# Altium PCB CurrentS_2_accurate_3d.PcbDoc
Units mil, origin at the board's own origin, x right, y up, seen from the top; angles counter-clockwise.
Board outline 9000 x 3000 mil, 2 copper layers (Top Layer, Bottom Layer); 70 components, 36 nets, 196 pads, 18 vias.
Unrouted connection lines stored in the file: 51.
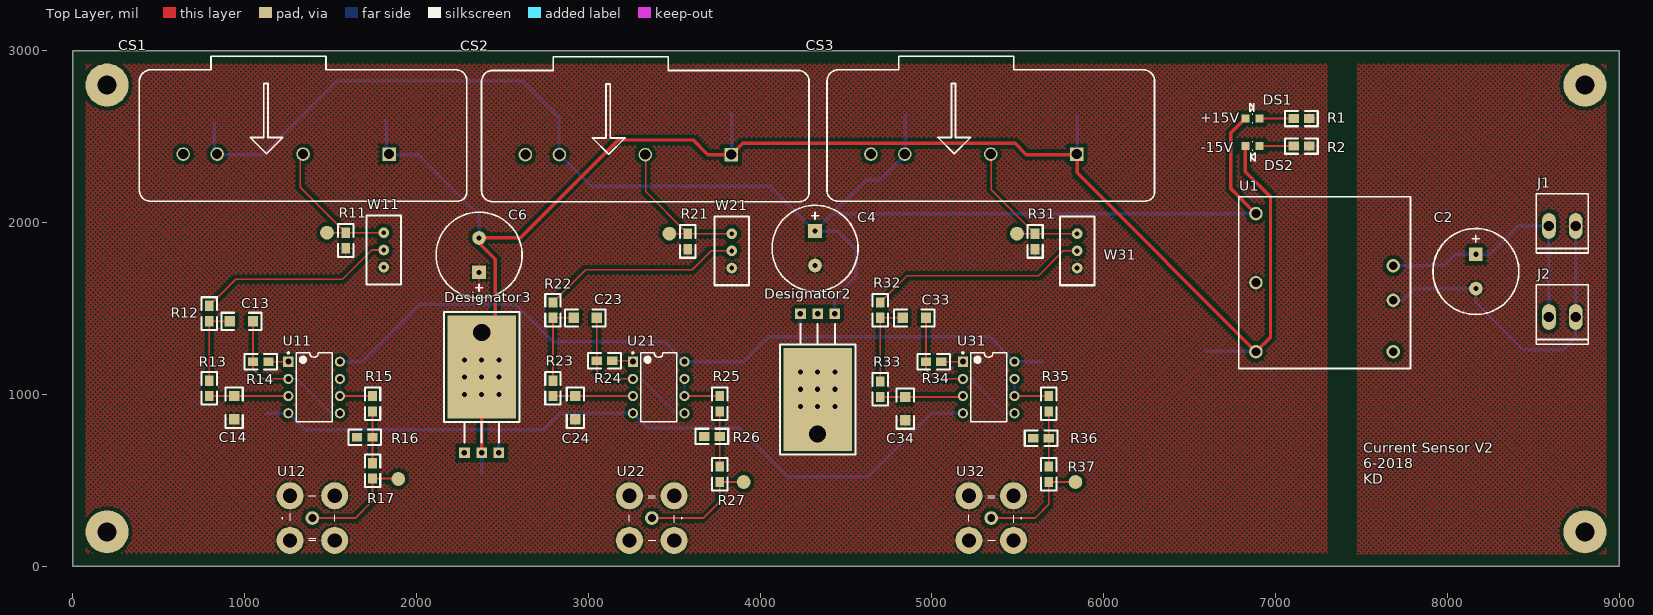
[diagram p0: Top Layer view]
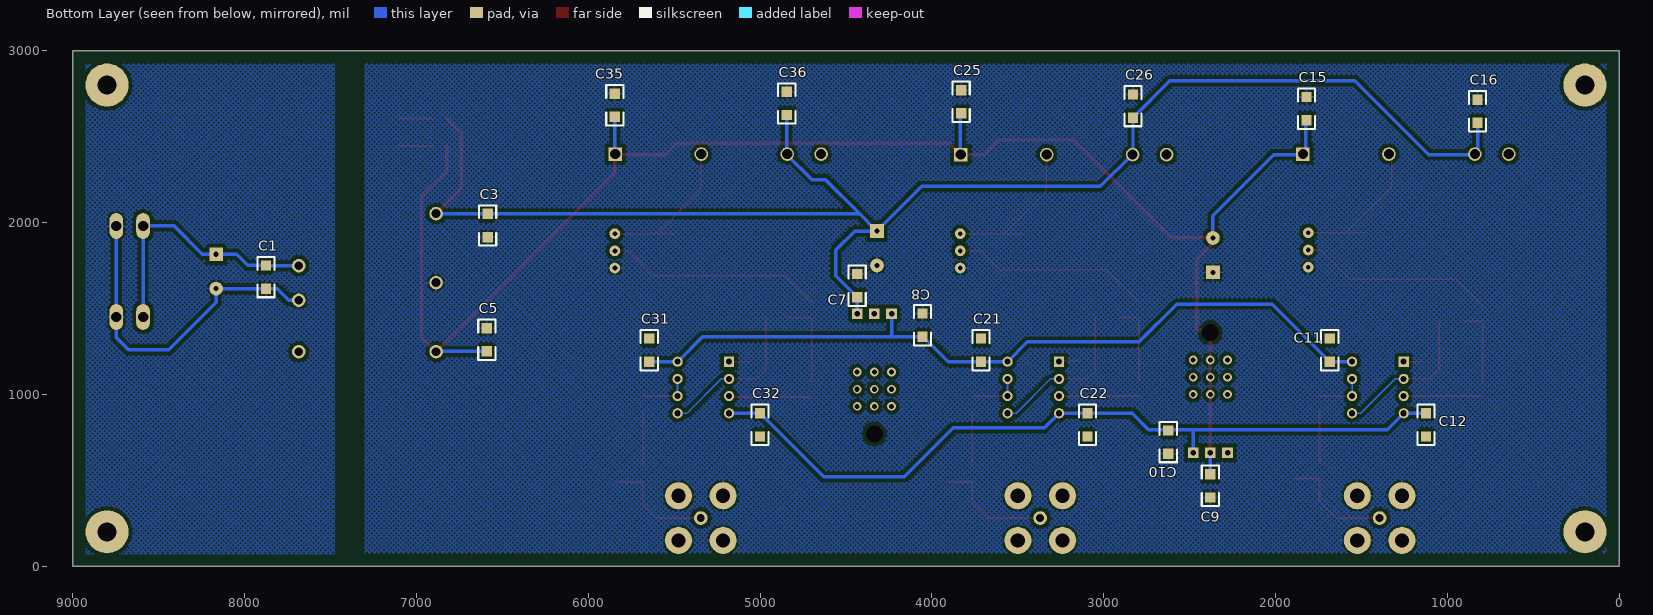
[diagram p1: Bottom Layer view, seen from below]

## Layer stack, top to bottom
Top Solder: solder mask 0.4, Solder Resist, Dk 3.5
Top Layer: signal copper 1.4
Dielectric 1: dielectric 12.6, FR-4, Dk 4.8
Bottom Layer: signal copper 1.4
Bottom Solder: solder mask 0.4, Solder Resist, Dk 3.5

## Board outline
0,0 9000,0 9000,3000 0,3000

## Design rules (kind name [scope] priority, off if disabled: settings)
AssemblyTestPointUsage [All] p1: valid=2
Clearance [All] p1: gap=20 ignorepadtopadclearanceinfootprint=FALSE
ComponentClearance [All] p1: gap=0 collisioncheckmode=3 verticalgap=0 showdistances=FALSE
Height [All] p1: minheight=0 maxheight=2000 prefheight=500
HoleSize [All] p1: absolutevalues=TRUE maxlimit=150 minlimit=1 maxpercent=80.000 minpercent=20.000
NetAntennae [All] p1: netantennaetolerance=1
PolygonConnect [All] p1: connectstyle=Relief reliefconductorwidth=10 reliefentries=4 polygonreliefangle="90 Angle" airgapwidth=10
RoutingVias [All] p1: holewidth=28 width=50 viastyle="Through Hole" minholewidth=28 minwidth=50 maxholewidth=30 maxwidth=50
SilkToSilkClearance [All] p1: silktosilkclearance=5
SilkToSolderMaskClearance [IsPad] p1: minsilkscreentomaskgap=5 clearancetoexposedcopper=TRUE
SolderMaskExpansion [All] p1: expansion=4
UnRoutedNet [All] p1: checkbadconnections=TRUE
Width Pwr_Width [(InNet('+Vin') OR InNet('-Vin') OR InNet('+15V') OR InNet('-15V') OR InNet('+9V') OR InNet('-9V'))] p1: maxlimit=30 minlimit=20 preferedwidth=20
Width [All] p2: maxlimit=10 minlimit=10 preferedwidth=10
22 further rules are at their usual default settings.

## Classes and differential pairs
component class CurrentS_2: C1 C2 C3 C4 C5 C6 C7 C8 C9 C10 C11 C12 C13 C14 C15 C16 C21 C22 C23 C24 C25 C26 C31 C32 C33 C34 C35 C36 DS1 DS2 J1 J2 R1 R2 R11 R12 R13 R14 R15 R16 R17 R21 R22 R23 R24 R25 R26 R27 R31 R32 R33 R34 R35 R36 R37 U1 U11 U12 U21 U22 U31 U32

## Components (designator, comment, footprint, x,y, rotation, side; value= is the part's Value field where it differs from the comment)
C1 "C3216C0G2J101J060AA" C1206 7875,1615 r90 bottom
C2 "ESMG500ELL102MK25S" CAP.2/.5 8165,1815 r270 top
C3 "C3216C0G2J101J060AA" C1206 6585,1915 r90 bottom
C4 "ESMG500ELL102MK25S" CAP.2/.5 4320,1950 r270 top
C5 "C3216C0G2J101J060AA" C1206 6590,1250 r90 bottom
C6 "ESMG500ELL102MK25S" CAP.2/.5 2365,1710 r90 top
C7 "C3216C0G2J101J060AA" C1206 4435,1700 r270 bottom
C8 "C3216C0G2J101J060AA" C1206 4055,1470 r270 bottom
C9 "C3216C0G2J101J060AA" C1206 2380,400 r90 bottom
C10 "C3216C0G2J101J060AA" C1206 2625,655 r90 bottom
C11 "C3216C0G2J101J060AA" C1206 1685,1325 r270 bottom
C12 "C3216C0G2J101J060AA" C1206 1125,755 r90 bottom
C13 "C3216C0G2J101J060AA" C1206 915,1425 r0 top
C14 "C3216C0G2J101J060AA" C1206 940,855 r90 top
C15 "C3216C0G2J101J060AA" C1206 1820,2730 r270 bottom
C16 "C3216C0G2J101J060AA" C1206 825,2715 r270 bottom
C21 "C3216C0G2J101J060AA" C1206 3715,1325 r270 bottom
C22 "C3216C0G2J101J060AA" C1206 3095,755 r90 bottom
C23 "C3216C0G2J101J060AA" C1206 2915,1445 r0 top
C24 "C3216C0G2J101J060AA" C1206 2925,855 r90 top
C25 "C3216C0G2J101J060AA" C1206 3830,2770 r270 bottom
C26 "C3216C0G2J101J060AA" C1206 2830,2745 r270 bottom
C31 "C3216C0G2J101J060AA" C1206 5645,1325 r270 bottom
C32 "C3216C0G2J101J060AA" C1206 5000,755 r90 bottom
C33 "C3216C0G2J101J060AA" C1206 4830,1445 r0 top
C34 "C3216C0G2J101J060AA" C1206 4845,850 r90 top
C35 "C3216C0G2J101J060AA" C1206 5845,2750 r270 bottom
C36 "C3216C0G2J101J060AA" C1206 4845,2760 r270 bottom
CS1 "Comment" "LA 125-P" 2293.76,2888.16 r180 top
CS2 "Comment" "LA 125-P" 4285,2885 r180 top
CS3 "Comment" "LA 125-P" 6295,2888 r180 top
Designator2 "Comment" TO-220 4435,1470 r180 top
Designator3 "Comment" TO-220 2280,660 r0 top
DS1 "SML-LXT0805GW-TR" LUMX-SML-LXT0805_V 6865,2605 r0 top
DS2 "SML-LXT0805GW-TR" LUMX-SML-LXT0805_V 6865,2445 r180 top
J1 "CON2" 3100-8-102-01 8588,1968 r270 top
J2 "CON2" 3100-8-102-01 8588,1438 r270 top
R1 "RC0805FR-07698RL" R0805 7195,2605 r180 top
R2 "RC0805FR-07698RL" R0805 7195,2445 r180 top
R11 "RC0805JR-0733RL" R0805 1590,1850 r90 top
R12 "RC0805FR-071KL" R0805 795,1425 r90 top
R13 "RC0805FR-071KL" R0805 795,990 r90 top
R14 "RC0805FR-071KL" R0805 1050,1190 r0 top
R15 "RC0805FR-071KL" R0805 1745,900 r90 top
R16 "RC0805FR-071KL" R0805 1745,750 r180 top
R17 "RC0805FR-071KL" R0805 1745,510 r90 top
R21 "RC0805JR-0733RL" R0805 3580,1845 r90 top
R22 "RC0805FR-071KL" R0805 2795,1445 r90 top
R23 "RC0805FR-071KL" R0805 2795,990 r90 top
R24 "RC0805FR-071KL" R0805 3050,1195 r0 top
R25 "RC0805FR-071KL" R0805 3765,900 r90 top
R26 "RC0805FR-071KL" R0805 3765,755 r180 top
R27 "RC0805FR-071KL" R0805 3765,490 r90 top
R31 "RC0805JR-0733RL" R0805 5600,1845 r90 top
R32 "RC0805FR-071KL" R0805 4700,1445 r90 top
R33 "RC0805FR-071KL" R0805 4700,985 r90 top
R34 "RC0805FR-071KL" R0805 4965,1190 r0 top
R35 "RC0805FR-071KL" R0805 5680,900 r90 top
R36 "RC0805FR-071KL" R0805 5680,745 r180 top
R37 "RC0805FR-071KL" R0805 5680,490 r90 top
U1 "PDQ15-Q24-D15-D" PDQ15-Q24-D15-D 6784.61,2150 r270 top
U11 "OPA2132P" P0008A 1405,1040 r0 top locked
U12 "BNC Elbow male" 5-1814400-1 1394.92,280.08 r180 top value=Value
U21 "OPA2132P" P0008A 3410,1040 r0 top locked
U22 "BNC Elbow male" 5-1814400-1 3369.96,280.08 r0 top value=Value
U31 "OPA2132P" P0008A 5330,1040 r0 top locked
U32 "BNC Elbow male" 5-1814400-1 5345,280.08 r0 top value=Value
W11 "Comment" VR5 1810,1940 r270 top
W21 "Comment" VR5 3835,1935 r270 top
W31 "Comment" VR5 5845,1935 r270 top

## Footprints (in the part's own frame and the unit in brackets; to place one, negate y for a bottom-side part, rotate by r counter-clockwise, add the part's x,y. Pads: shape width x height; smd on the part's side, far side on the other; paste and mask are expansions set on the pad)
5-1814400-1 [mm]
  round 2.032 / inner round 1.524 / far side round 2.032 hole 1.17: 1(0,0)
  round 4 hole 2.11: 2(-3.3,3.3) 3(-3.3,-3.3) 5(3.3,3.3)
  round 4 hole 2.11 paste+1: 4(3.3,-3.3)
  silkscreen extent -3.3,-3.3 4.5,3.3, body extent 0,0 0.25,0.25, height 0.25
3100-8-102-01 [mil]
  oval 150x80 hole 60: 1(-12,2) 2(-12,158)
  silkscreen extent -200,-71 146,231
C1206 [mil]
  rect 60x60 smd: 1(0,0) 2(135,0)
  silkscreen extent -50,-50 185,50, body extent -10,-30 145,30, height 50
CAP.2/.5 [mil] "ESMG500ELL102MK25S"
  rect 80x80 hole 30: 1(0,0)
  round 80 hole 30: 2(200,0)
  silkscreen extent -150,-250 350,250
"LA 125-P" [mm] "LEM hall-effect current sensor(footprint)"
  round 2 hole 1.5: 1(24.2,12.45) 2(36.9,12.45) 4(41.92,12.45)
  rect 2x2 hole 1.5: 3(11.5,12.45)
  silkscreen extent 0,-2 48.4,19.4, body extent 0,0 48.4,19.4, height 33.2
LUMX-SML-LXT0805_V [mm] "SMD, 2-Leads, Body 2x1.25mm"
  rect 1.2x1.2 smd: 1(-1.05,0) 2(1.05,0)
  silkscreen extent -0.41,-0.63 0.23,2.25, body extent -1,-0.63 1,0.63, height 0.8
P0008A [mm] "DIP, 8-Leads, Body 10.15x6.6mm, Pitch 2.54mm"
  rect 1.5x1.5 hole 0.9: 1(-3.81,3.81)
  round 1.5 hole 0.9: 2(-3.81,1.27) 3(-3.81,-1.27) 4(-3.81,-3.81) 5(3.81,-3.81) 6(3.81,-1.27) 7(3.81,1.27) 8(3.81,3.81)
  silkscreen extent -3.93,-5.1 2.65,5.23, body extent -3.95,-5.07 3.95,5.07, height 5.08
PDQ15-Q24-D15-D [mm] "+/-15V 15W output DC/DC converter"
  round 2 hole 1.3: 1(10.2,22.85) 2(15.3,22.85) 3(2.5,2.55) 4(12.7,2.55) 5(22.9,2.55) 6(22.9,22.85)
  silkscreen extent 0,0 25.4,25.4, body extent 0.1,0.1 25.5,25.5, height 10.2
R0805 [mil]
  rect 60x50 smd: 1(0,0) 2(90,0)
  silkscreen extent -50,-45 140,45, body extent -10,-25 100,25, height 40
TO-220 [mil]
  rect 62x62 hole 32: 1(0,0) 2(100,0) 3(200,0)
  round 60 hole 100: 2(100,700)
  rect 400x600 smd: 2(100,500)
  silkscreen extent -120,60 320,820, body extent -100,200 300,800, height 100
VR5 [mil]
  round 62 hole 28: 1(0,0) 2(100,0) 3(200,0)
  silkscreen extent -100,-100 300,100, body extent -95,-95 295,95, height 434

## Part data
C1 C3 C5 C7 C8 C9 C10 C11 C12 C13 C14 C15 C16 C21 C22 C23 C24 C25 C26 C31 C32 C33 C34 C35 C36: "100pF ±5% 630V C0G, NP0 Ceramic Capacitor -55°C ~ 125°C Surface Mount, MLCC 1206 (3216 Metric) 0.126\" L x 0.063\" W (3.20mm x 1.60mm)", Capacitance=100pF, Case/Package=1206, Case Code (Metric)=3216, Dielectric=C0G, Manufacturer=TDK, Max Operating Temperature=125°C, Min Operating Temperature=-55°C, Package Quantity=1, Supplier Part Number 1=445-2336-6-ND, Temperature Coefficient=30ppm/°C, Tolerance=5%, Voltage=630V, Case Code (Imperial)=1206, ComponentLink1Description=https://datasheet.ciiva.com/24191/c3216c0g2j101j060aa-24191569.pdf, ComponentLink1URL=https://datasheet.ciiva.com/24191/c3216c0g2j101j060aa-24191569.pdf, ComponentLink2Description=https://datasheet.ciiva.com/46384/1484596-46384214.pdf, ComponentLink2URL=https://datasheet.ciiva.com/46384/1484596-46384214.pdf, ComponentLink3Description=https://datasheet.ciiva.com/11788/0900766b80fc5cba-11788154.pdf, ComponentLink3URL=https://datasheet.ciiva.com/11788/0900766b80fc5cba-11788154.pdf, ComponentLink4Description=https://datasheet.ciiva.com/22677/1484596-22677290.pdf, ComponentLink4URL=https://datasheet.ciiva.com/22677/1484596-22677290.pdf, ComponentLink5Description=https://datasheet.ciiva.com/24219/c3216c0g2j101j060aa-264968-24219087.pdf, ComponentLink5URL=https://datasheet.ciiva.com/24219/c3216c0g2j101j060aa-264968-24219087.pdf, Depth=1.6mm, Height=0.6mm, Lead Free="Lead Free", Length=3.2mm, Manufacturer Part Number=C3216C0G2J101J060AA, Mount="Surface Mount", Packaging="Tape and Reel", Pricing 1="1=0.28, 10=0.19, 100=0.0961, 500=0.06578, 1000=0.05819 (USD)", REACH SVHC="No SVHC", Stock 1=40000, Supplier 1=Digi-Key, Termination=SMD/SMT, Thickness=0.03inch, Voltage Rating=630V, Voltage Rating (DC)=630V, Weight=0.000571oz, Width=0.063inch
C2 C4 C6: "CAP ALUM 1000UF 20% 50V RADIAL", Capacitance=1mF, Case/Package=Radial, Dielectric Material=Aluminium, Manufacturer="United Chemi-Con", Max Operating Temperature=85°C, Min Operating Temperature=-40°C, Package Quantity=1000, Ripple Current=1.34A, Supplier Part Number 1=565-1114-ND, Tolerance=20%, Voltage Rating=50V, ComponentLink1Description=https://datasheet.ciiva.com/99/smg-series-rev-i-99589.pdf, ComponentLink1URL=https://datasheet.ciiva.com/99/smg-series-rev-i-99589.pdf, ComponentLink2Description=https://datasheet.ciiva.com/7931/8790-7931258.pdf, ComponentLink2URL=https://datasheet.ciiva.com/7931/8790-7931258.pdf, ComponentLink3Description=https://datasheet.ciiva.com/15951/12cat-db-al-cgieejppdfnamesmg-cgieejppdfnamesmg-15951254.pdf, ComponentLink3URL=https://datasheet.ciiva.com/15951/12cat-db-al-cgieejppdfnamesmg-cgieejppdfnamesmg-15951254.pdf, Diameter=12.5mm, Height=25mm, Height - Seated (Max)=1.043inch, Lead Free="Lead Free", Lead Pitch=5mm, Life (Hours)=2000Hour, Manufacturer Part Number=ESMG500ELL102MK25S, Mount="Through Hole", Packaging=Bulk, Pricing 1="1=1.32, 10=1.043, 100=0.782, 500=0.59084, 1000=0.52133, 2500=0.48657, 5000=0.46919 (USD)", REACH SVHC=Unknown, Stock 1=1677, Supplier 1=Digi-Key, Termination=Radial, Voltage Rating (DC)=50V
DS1 DS2: library part CMP-1724-00001-1, "LED, GREEN, 565 nm, 2 V, -25 to 80 degC, 2-Pin SMD, RoHS, Tape and Reel", Case\/Package=0805, Case Code (Metric)=2012, Max Operating Temperature="85 degC", Min Operating Temperature="-25 degC", Package Quantity=4000, Case Code (Imperial)=0805, ComponentLink1Description="Manufacturer URL", ComponentLink1URL=http://www.lumexinstruments.com/, ComponentLink2Description=Datasheet, ComponentLink2URL=http://www.lumex.com/content/files/ProductAttachment/SML-LXT0805GW-TR.pdf, DatasheetVersion="Rev. F, 09/2009", Length="2 mm", Mount="Surface Mount", Mounting Technology="Surface Mount", PackageDescription="2-Pin Surface Mount Device, Body 2 x 1.25 mm", PackageReference=SML-LXT0805, Packaging="Tape and Reel", REACH SVHC="No SVHC", RoHSCompliant=true, Width="1.25 mm"
J1 J2: "Connector", Colour=White,Natural, Contact Current Rating=7A, Contact Resistance=3mR, Flammability Rating="UL94 V-0", Housing Colour=White, Manufacturer="TE Connectivity", Manufacturer Part Number=640445-2, Max Operating Temperature=221°C, Max Voltage Rating (AC)=600V, Min Operating Temperature=-67°C, Number of Power Positions=2, Package Quantity=1000, Supplier Part Number 1=A1971-ND, Approvals=CSA, Backwall/Post Interruptions="No (Without)", Circuit Application=Power, ComponentLink1Description=https://datasheet.ciiva.com/19460/231546-19460984.pdf, ComponentLink1URL=https://datasheet.ciiva.com/19460/231546-19460984.pdf, ComponentLink2Description=https://datasheet.ciiva.com/16200/eng-ds-82056-mta-0608-16200060.pdf, ComponentLink2URL=https://datasheet.ciiva.com/16200/eng-ds-82056-mta-0608-16200060.pdf, ComponentLink3Description=https://datasheet.ciiva.com/3118/eng-ds-82056-mta-0608-3118478.pdf, ComponentLink3URL=https://datasheet.ciiva.com/3118/eng-ds-82056-mta-0608-3118478.pdf, ComponentLink4Description=https://datasheet.ciiva.com/16656/eng-ds-82056-mta-0608-16656510.pdf, ComponentLink4URL=https://datasheet.ciiva.com/16656/eng-ds-82056-mta-0608-16656510.pdf, ComponentLink5Description=https://datasheet.ciiva.com/11747/0900766b812be9d8-11747738.pdf, ComponentLink5URL=https://datasheet.ciiva.com/11747/0900766b812be9d8-11747738.pdf, ComponentLink6Description=https://datasheet.ciiva.com/709/eng-cd-640445-ad1-709687.pdf, ComponentLink6URL=https://datasheet.ciiva.com/709/eng-cd-640445-ad1-709687.pdf, ComponentLink7Description=https://datasheet.ciiva.com/14638/70083689-14638437.pdf, ComponentLink7URL=https://datasheet.ciiva.com/14638/70083689-14638437.pdf, ComponentLink8Description=https://datasheet.ciiva.com/16505/eng-ds-82056-mta-0608-16505416.pdf, ComponentLink8URL=https://datasheet.ciiva.com/16505/eng-ds-82056-mta-0608-16505416.pdf, ComponentLink9Description=https://datasheet.ciiva.com/7703/100170-7703301.pdf, ComponentLink9URL=https://datasheet.ciiva.com/7703/100170-7703301.pdf, ComponentLink10Description=https://datasheet.ciiva.com/48697/001278462-da-01-en-stiftleiste-gerade-640445-2-48697366.pdf, ComponentLink10URL=https://datasheet.ciiva.com/48697/001278462-da-01-en-stiftleiste-gerade-640445-2-48697366.pdf, Connector System=Wire-to-Board, Connector Type=Tab, Contact Gender=Male, Contact Material="Copper Alloy", Contact Mating Length=0.4inch, Contact Plating=Tin, Contact Retention="No (Without)", Current Rating=7A, Depth=7.62mm, ELV=Compliant, Fastening Type=Friction, Gender=Male, Height=10.79mm, Housing Material=Polyester, Lead Free="Lead Free", Length=0.312inch, Material=Polyester, Mating Alignment="No (Without)", Mating Post Length=0.4inch, Mating Retention="Yes (With)", Mount="Through Hole,PCB", Number of Contacts=2, Number of Positions=2, Number of Rows=1, Orientation=Straight, Packaging=Bulk, PCB Mount Alignment="No (Without)", PCB Mounting Orientation=Vertical, PCB Mount Retention=Without, PCB Thickness=0.063inch, Pitch=0.156inch, Pricing 1="1=0.15, 10=0.144, 100=0.0886, 500=0.07332, 1000=0.06416, 5000=0.05499, 10000=0.05347 (USD)", Radiation Hardening=No, REACH SVHC="No SVHC", Sealable="No (Without)", Shrouded="No (Without)", Stock 1=36842, Strain Relief="No (Without)", Supplier 1=Digi-Key, Termination=Solder, Termination Post Length=3.18mm, Underplate Material=Nickel, Voltage Rating=600V
R1 R2: "RES SMD 698 OHM 1% 1/8W 0805", Case/Package=0805, Case Code (Metric)=2012, Manufacturer=Yageo, Max Operating Temperature=155°C, Max Power Dissipation=125mW, Min Operating Temperature=-55°C, Package Quantity=1, Resistance=698R, Supplier Part Number 1=311-698CRCT-ND, Temperature Coefficient=100ppm/°C, Tolerance=1%, Voltage Rating=150V, Case Code (Imperial)=0805, ComponentLink1Description=https://datasheet.ciiva.com/2458/pyu-r-int-thick-7-2458144.pdf, ComponentLink1URL=https://datasheet.ciiva.com/2458/pyu-r-int-thick-7-2458144.pdf, ComponentLink2Description=https://datasheet.ciiva.com/12561/rc0805-257173-12561189.pdf, ComponentLink2URL=https://datasheet.ciiva.com/12561/rc0805-257173-12561189.pdf, ComponentLink3Description=https://datasheet.ciiva.com/17055/rc0805-17055621.pdf, ComponentLink3URL=https://datasheet.ciiva.com/17055/rc0805-17055621.pdf, ComponentLink4Description=https://datasheet.ciiva.com/2458/pyu-r-int-thick-7-2458142.pdf, ComponentLink4URL=https://datasheet.ciiva.com/2458/pyu-r-int-thick-7-2458142.pdf, ComponentLink5Description=https://datasheet.ciiva.com/2458/pyu-r-int-thick-7-2458143.pdf, ComponentLink5URL=https://datasheet.ciiva.com/2458/pyu-r-int-thick-7-2458143.pdf, Composition="Thick Film", Contact Plating=Tin,Matte, Depth=1.25mm, Height=0.024inch, Lead Free="Lead Free", Length=2mm, Manufacturer Part Number=RC0805FR-07698RL, Military Standard=Not, Number of Terminations=2, Packaging="Tape and Reel", Power Rating=125mW, Pricing 1="1=0.1, 10=0.042, 100=0.0169, 1000=0.00759, 2500=0.00659 (USD)", Radiation Hardening=No, Stock 1=175243, Supplier 1=Digi-Key, Termination=SMD/SMT, Voltage Rating (DC)=150V, Width=0.049inch
R11 R21 R31: "YAGEO (PHYCOMP)         RC0805JR-0733RL             SMD Chip Resistor, Thick Film, 33 ohm, 150 V, 0805 [2012 Metric], 250 mW,  5%, RC Series", Case/Package=0805, Case Code (Metric)=2012, Manufacturer=Yageo, Max Operating Temperature=155°C, Min Operating Temperature=-55°C, Power Rating=125mW, Resistance=33R, Supplier Part Number 1=311-33ARCT-ND, Temperature Coefficient=100ppm/°C, Tolerance=5%, Voltage Rating=150V, Case Code (Imperial)=0805, ComponentLink1Description=https://datasheet.ciiva.com/17053/rc0805-17053447.pdf, ComponentLink1URL=https://datasheet.ciiva.com/17053/rc0805-17053447.pdf, ComponentLink2Description=https://datasheet.ciiva.com/7941/442941-7941947.pdf, ComponentLink2URL=https://datasheet.ciiva.com/7941/442941-7941947.pdf, ComponentLink3Description=https://datasheet.ciiva.com/7941/442941-7941948.pdf, ComponentLink3URL=https://datasheet.ciiva.com/7941/442941-7941948.pdf, Composition="Thick Film", Contact Plating=Tin,Lead,Matte, Depth=1.25mm, Height=0.5mm, Lead Free="Lead Free", Length=2mm, Manufacturer Part Number=RC0805JR-0733RL, Military Standard=Not, Packaging="Tape and Reel", Pricing 1="1=0.1, 10=0.036, 100=0.0145, 1000=0.00652, 2500=0.00566 (USD)", Radiation Hardening=No, REACH SVHC=Unknown, Stock 1=49512, Supplier 1=Digi-Key, Termination=SMD/SMT, Weight=0.000194oz, Width=1.25mm
R12 R13 R14 R15 R16 R17 R22 R23 R24 R25 R26 R27 R32 R33 R34 R35 R36 R37: "RES SMD 1K OHM 1% 1/8W 0805", Case/Package=0805, Case Code (Metric)=2012, Manufacturer=Yageo, Max Operating Temperature=155°C, Max Power Dissipation=125mW, Min Operating Temperature=-55°C, Package Quantity=1, Resistance=1kR, Supplier Part Number 1=311-1.00KCRCT-ND, Temperature Coefficient=100ppm/°C, Tolerance=1%, Voltage Rating=150V, Case Code (Imperial)=0805, ComponentLink1Description=https://datasheet.ciiva.com/2456/pyu-r-int-thick-7-2456976.pdf, ComponentLink1URL=https://datasheet.ciiva.com/2456/pyu-r-int-thick-7-2456976.pdf, ComponentLink2Description=https://datasheet.ciiva.com/2456/pyu-r-int-thick-7-2456977.pdf, ComponentLink2URL=https://datasheet.ciiva.com/2456/pyu-r-int-thick-7-2456977.pdf, ComponentLink3Description=https://datasheet.ciiva.com/11819/0900766b8106beab-11819814.pdf, ComponentLink3URL=https://datasheet.ciiva.com/11819/0900766b8106beab-11819814.pdf, ComponentLink4Description=https://datasheet.ciiva.com/7941/1686128-7941719.pdf, ComponentLink4URL=https://datasheet.ciiva.com/7941/1686128-7941719.pdf, ComponentLink5Description=https://datasheet.ciiva.com/16850/rc0805-16850409.pdf, ComponentLink5URL=https://datasheet.ciiva.com/16850/rc0805-16850409.pdf, ComponentLink6Description=https://datasheet.ciiva.com/46385/444164-46385020.pdf, ComponentLink6URL=https://datasheet.ciiva.com/46385/444164-46385020.pdf, ComponentLink7Description=https://datasheet.ciiva.com/2456/pyu-r-int-thick-7-2456975.pdf, ComponentLink7URL=https://datasheet.ciiva.com/2456/pyu-r-int-thick-7-2456975.pdf, Composition="Thick Film", Depth=1.25mm, Height=0.024inch, Lead Free="Lead Free", Length=0.079inch, Manufacturer Part Number=RC0805FR-071KL, Military Standard=Not, Number of Pins=2, Number of Terminations=2, Packaging="Tape and Reel", Power Rating=125mW, Pricing 1="1=0.1, 10=0.042, 100=0.0169, 1000=0.00759, 2500=0.00659 (USD)", REACH SVHC=Unknown, Stock 1=5400247, Supplier 1=Digi-Key, Termination=SMD/SMT, Voltage Rating (DC)=150V, Width=0.049inch
U1: "Isolated DC/DC Converters 15W 9-36Vin +/-15V +/-500mA Iso Reg DIP", Supplier Part Number 1=102-3878-ND, Supplier 1=Digi-Key
U11 U21 U31: library part CMP-0271-00384-3, "High Speed FET-Input Operational Amplifier, 5 to 36 V, -40 to 125 degC, 8-pin DIP (P8), Green (RoHS & no Sb/Br)", Manufacturer="Texas Instruments", Rating=Catalog, Total Supply Voltage(Max)(+5V is 5, +/-5V is 10)=36, Total Supply Voltage(Min)(+5V is 5, +/-5V is 10)=5, CMRR(Min)(dB)=96, Code_JEDEC=MS-001, ComponentLink1Description="Manufacturer URL", ComponentLink1URL=http://www.ti.com/, ComponentLink2Description=Datasheet, ComponentLink2URL=http://www.ti.com/lit/ds/symlink/opa2132.pdf, ComponentLink3Description="Package Specification", ComponentLink3URL=http://www.ti.com/litv/pdf/mpdi001b, DatasheetVersion=SBOS054A, Eco-Plan="Green (RoHS & no Sb/Br)", GBW(Typ)(MHz)=8, IIB(Max)(pA)=50, Iq per channel(Max)(mA)=4.8, Mounting Technology="Through Hole", Number of Channels=2, Offset Drift(Typ)(uV/C)=2, PackageDescription="8-Pin Plastic In-Line, Body 9.59 x 6.35 mm, Pitch 2.54 mm", PackageReference=P0008A, PackageVersion="4040082/E, 04/2010", Packing=TUBE, PartNumber=OPA2132P, Slew Rate(Typ)(V/us)=20, Sub Family="High Supply Voltage Amplifier (>=30V), Low Noise Amp (<=10nV/rtHz), Low Offset Voltage Amplifier (<=500uV), Precision Amplifier", Vio (25C)(Max)(mV)=0.5
U12 U22 U32: "BNC Low Profile Elbow Connector", Contact Resistance=1.5mR, Dielectric Material=PTFE, Frequency=2GHz, Insulation Resistance=5GR, Manufacturer="TE Connectivity", Manufacturer_Part_Number=5-1634513-1, Max Operating Temperature=85°C, Min Operating Temperature=-55°C, Package Quantity=100, Supplier Part Number 1=A97569-ND, Working Voltage=500V, Body Material=Zinc, Body Plating=Nickel, ComponentLink1Description=https://datasheet.ciiva.com/9423/eng-cd-1634513-c-9423831.pdf, ComponentLink1URL=https://datasheet.ciiva.com/9423/eng-cd-1634513-c-9423831.pdf, ComponentLink2Description=https://datasheet.ciiva.com/1448/49781-1448584.pdf, ComponentLink2URL=https://datasheet.ciiva.com/1448/49781-1448584.pdf, ComponentLink3Description=https://datasheet.ciiva.com/5757/49781-5757585.pdf, ComponentLink3URL=https://datasheet.ciiva.com/5757/49781-5757585.pdf, ComponentLink4Description=https://datasheet.ciiva.com/14567/70084641-14567974.pdf, ComponentLink4URL=https://datasheet.ciiva.com/14567/70084641-14567974.pdf, ComponentLink5Description=https://datasheet.ciiva.com/642/eng-cd-1634513-e-642840.pdf, ComponentLink5URL=https://datasheet.ciiva.com/642/eng-cd-1634513-e-642840.pdf, ComponentLink6Description=https://datasheet.ciiva.com/16652/eng-cd-1634513-c-16652898.pdf, ComponentLink6URL=https://datasheet.ciiva.com/16652/eng-cd-1634513-c-16652898.pdf, ComponentLink7Description=https://datasheet.ciiva.com/11762/0900766b807b5959-11762602.pdf, ComponentLink7URL=https://datasheet.ciiva.com/11762/0900766b807b5959-11762602.pdf, Connector Type=BNC,Jack, Contact Material=Bronze, Contact Plating=Gold, Copyright="Copyright (C) 2015 Accelerated Designs. All rights reserved", Depth=11mm, Fastening Type=Bayonet, Gender=Female, Impedance=50R, Insulation Material=Polytetrafluoroethylene, Length=28.1mm, Manufacturer Part Number=5-1634513-1, Mating Cycles=50, Max Frequency=2GHz, Mount="Through Hole,PCB", Number of Positions=1, Orientation="Right Angle", Packaging=Tray, PCB Mounting Orientation="Right Angle", PCB Mount Retention=With, PCB Thickness=0.126inch, Polarity=Normal, Pricing 1="1=3.31, 10=3.18, 25=2.9148, 50=2.7824, 100=2.6498, 250=2.3186, 500=2.25234, 1000=1.92112, 2500=1.78863 (USD)", Radiation Hardening=No, REACH SVHC=Unknown, RefDes=RefDes, Sealable="No (Without)", Stock 1=1905, Supplier 1=Digi-Key, Termination=Solder, Type=Type, Vendor="Tyco Electronics"

## Free pads (board coordinates)
  round 250 hole 110: 2(8800,2800) 3(200,2800) 4(200,200) 5(8800,200)
  round 80 smd: 6(1480,1940.92) 7(3472.01,1935) 8(5495,1935) 9(1895,507.69) 10(3905,490) 11(5835,490)

## Via types
v1: diameter 50, hole 30, Top Layer to Bottom Layer, 18 vias

## Nets (pads, with @x,y where several pads share a name; then routed paths per layer and width w, separated by ;. In a path a pad name is that pad's centre, name@x,y a point inside that pad or via, vN(x,y) a via of type N, cw(c..) or ccw(c..) an arc to the next point about the centre after c; other vN are vias at no path point)
+9V: C8.2 C11.1 C21.1 C31.1 U11.8 U21.8 U31.8 | length 4622.6
  Bottom Layer w20: U11.8 1685,1190 2020,1525 2575,1525 2795,1305 3445,1305 U21.8 3715,1190 3905,1190 4050,1335 4235,1335 ; 4235,1470 4235,1335 ; 5645,1190 U31.8 5335,1335 4235,1335
+15V: C3.2 C4.1 C7.2 C16.2 C26.2 C36.2 DS1.1 U1.3 | length 9104
  Top Layer w20: DS1.1 6740,2521.34 6740,2196.57 U1.3
  Bottom Layer w20: C16.2 825,2395 1110,2395 1540,2825 2615,2825 C26.2 2830,2400 2835,2395 3020,2210 4060,2210 C4.1 ; 4435,1470 C7.2 4560,1690 4560,1840 4450,1950 C4.1 ; C36.2 4845,2395 4700,2250 4620,2250 4420,2050 ; U1.3 6883.43,2050 C3.2 4420,2050 ; C4.1 4420,2050
+Vin: C1.2 C2.1 J1.1 J2.1 U1.1 | length 1531.7
  Bottom Layer w20: U1.1 7873.43,1748.43 C1.2 7980,1750 8045,1815 C2.1 8245,1815 8410,1980 J1.1 J2.1
-9V: C10.2 C12.1 C22.1 C32.1 U11.4 U21.4 U31.4 | length 4575.2
  Bottom Layer w20: 1125,890 U11.4 1350,795 2480,795 ; 2480,660 2480,795 ; U31.4 5000,890 4630,520 4160,520 3875,805 3345,805 U21.4 3095,890 2835,890 2740,795 2480,795
-15V: C5.1 C6.2 C9.2 C15.2 C25.2 C35.2 DS2.2 U1.5 | length 9931.7
  Top Layer w20: 2380,660 2380,1000 2380,1100 2384.59,1159.65 2385,1165 2380,1200 2380,1360 ; 2380,1375 2460,1375 2460,1785 2365,1880 C6.2 2605,1910 3175,2480 3610,2480 3695,2395 3835,2395 3900,2460 5485,2460 5550,2395 5845,2395 5845,2288.43 U1.5 6970,1333.43 6970,2150 6823.66,2296.34 DS2.2
  Bottom Layer w20: C15.2 1825,2590 1825,2395 2010,2395 2365,2040 C6.2 ; C9.2 2380,660 ; C25.2 3835,2630 3835,2395 ; 5845,2395 C35.2 ; C5.1 6883.43,1250 U1.5
-Vin: C1.1 C2.2 J1.2 J2.2 U1.2 | length 1962
  Bottom Layer w20: U1.2 7742.64,1547.64 7810,1615 C1.1 C2.2 8165,1535 8440,1260 8675,1260 8746,1331 J2.2 J1.2
GND: C3.1 C4.2 C5.2 C6.1 C7.1 C8.1 C9.1 C10.1 C11.2 C12.2 C14.1 C15.1 C16.1 C21.2 C22.2 C24.1 C25.1 C26.1 C31.2 C32.2 C34.1 C35.1 C36.1 R1.1 R2.1 R11.1 R16.1 R21.1 R26.1 R31.1 R36.1 U1.4 U12.2 U12.3 U12.4 U12.5 U22.2 U22.3 U22.4 U22.5 U32.2 U32.3 U32.4 U32.5
NetC13_1: C13.1 R12.2 R13.1 | length 465
  Top Layer w10: 795,1080 795,1425 C13.1
NetC13_2: C13.2 R14.2 U11.2 U11.5 | length 890.6
  Top Layer w10: C13.2 1050,1190 1050,1145 1105,1090 U11.2
  Bottom Layer w10: U11.2 1305,1090 1505,890 U11.5
NetC14_2: C14.2 R13.2 U11.3 | length 460
  Top Layer w10: 795,990 C14.2 U11.3
NetC23_1: C23.1 R22.2 R23.1 | length 485
  Top Layer w10: 2795,1080 2795,1445 C23.1
NetC23_2: C23.2 R24.2 U21.2 U21.5 | length 921.5
  Top Layer w10: C23.2 3050,1195 3050,1135 3095,1090 U21.2
  Bottom Layer w10: U21.2 3310,1090 3510,890 U21.5
NetC24_2: C24.2 R23.2 U21.3 | length 465
  Top Layer w10: 2795,990 C24.2 U21.3
NetC33_1: C33.1 R32.2 R33.1 | length 500
  Top Layer w10: 4700,1075 4700,1445 C33.1
NetC33_2: C33.2 R34.2 U31.2 U31.5 | length 920.6
  Top Layer w10: C33.2 4965,1190 4965,1145 5020,1090 U31.2
  Bottom Layer w10: U31.2 5225,1090 5425,890 U31.5
NetC34_2: C34.2 R33.2 U31.3 | length 482.1
  Top Layer w10: 4700,985 C34.2 5175,985 U31.3
NetCS1_1: pad.6 R11.2 | length 893.8
  Top Layer w10: 1325,2395 1325,2205 R11.2@1589.08,1940.92 ; pad.6 R11.2@1589.08,1940.92 ; 1810,1940 R11.2 R11.2@1589.08,1940.92
NetCS2_1: pad.7 R21.2 | length 924.5
  Top Layer w10: 3335,2395 3335,2180 R21.2 ; pad.7 R21.2 ; 3835,1935 R21.2
NetCS3_1: pad.8 R31.2 | length 915.6
  Top Layer w10: 5345,2395 5345,2190 R31.2 ; pad.8 R31.2 ; 5845,1935 R31.2
NetDS1_2: DS1.2 R1.2 | length 198.7
  Top Layer w10: DS1.2 R1.2
NetDS2_1: DS2.1 R2.2 | length 198.7
  Top Layer w10: DS2.1 R2.2
NetR12_1: R12.1 | length 1149.6
  Top Layer w10: 795,1515 950,1670 1570,1670 1740,1840 1810,1840
NetR14_1: R14.1 U11.1 | length 115
  Top Layer w10: 1140,1190 U11.1
NetR15_1: R15.1 U11.6 U11.7 | length 300
  Top Layer w10: 1745,600 1745,750 R15.1
NetR15_2: R15.2 R16.2 R17.2 | length 290
  Top Layer w10: 1555,990 R15.2
  Bottom Layer w10: 1555,990 1555,1090
NetR17_1: pad.9 R17.1 U12.1 | length 672.4
  Top Layer w10: U12.1 1645.08,280.08 1745,380 R17.1 1892.69,510 pad.9
NetR22_1: R22.1 | length 1164.3
  Top Layer w10: 2795,1535 2985,1725 3605,1725 3715,1835 3835,1835
NetR24_1: R24.1 U21.1 | length 122.1
  Top Layer w10: 3140,1195 3255,1195 U21.1
NetR25_1: R25.1 U21.6 U21.7 | length 320
  Top Layer w10: 3765,580 3765,755 R25.1
NetR25_2: R25.2 R26.2 R27.2 | length 305
  Top Layer w10: 3560,990 R25.2
  Bottom Layer w10: 3560,990 3560,1090
NetR27_1: pad.10 R27.1 U22.1 | length 689.4
  Top Layer w10: U22.1 3670.08,280.08 3765,375 R27.1 pad.10
NetR32_1: R32.1 | length 1269.3
  Top Layer w10: 4700,1535 4855,1690 5620,1690 5765,1835 5845,1835
NetR34_1: R34.1 U31.1 | length 125
  Top Layer w10: 5055,1190 U31.1
NetR35_1: R35.1 U31.6 U31.7 | length 320
  Top Layer w10: 5680,580 5680,745 R35.1
NetR35_2: R35.2 R36.2 R37.2 | length 300
  Top Layer w10: 5480,990 R35.2
  Bottom Layer w10: 5480,990 5480,1090
NetR37_1: pad.11 R37.1 U32.1 | length 653.1
  Top Layer w10: U32.1 5600.08,280.08 5680,360 R37.1 pad.11
pads on no net: CS1.1 CS1.2 CS1.3 CS1.4 CS2.1 CS2.2 CS2.3 CS2.4 CS3.1 CS3.2 CS3.3 CS3.4 Designator2.1 Designator2.2 Designator2.3 Designator3.1 Designator3.2 Designator3.3 U1.6 W11.1 W11.2 W11.3 W21.1 W21.2 W21.3 W31.1 W31.2 W31.3
copper on no net:
  other v1: 4235,930 4335,930 4435,930 2280,1000 2380,1000 2480,1000 4235,1030 4335,1030 4435,1030 2280,1100 2380,1100 2480,1100 4235,1130 4335,1130 4435,1130 2280,1200 2380,1200 2480,1200

## Polygon pours and split planes (outlines as drawn)
GND on Top Layer "GND_top" (hatched 45Degree grid 20 track 8, pour order 8): 7300,2925 7300,75 7295,75 75,75 75,2925
-Vin on Top Layer "-Vin_top" (hatched 45Degree grid 20 track 8, pour order 2): 7475,2925 8925,2925 8925,70 7475,70
GND on Bottom Layer "GND_bottom" (hatched 45Degree grid 20 track 8, pour order 14): 7300,2925 7300,75 75,75 75,2925
-Vin on Bottom Layer "-Vin_bottom" (hatched 45Degree grid 20 track 8, pour order 12): 8925,2925 7475,2925 7475,70 8925,70

## Silkscreen, mask and mechanical layers (free items; w line width, h text height)
Top Overlay:
  text "+15V" at 6560,2580 h60
  text "-15V" at 6565,2410 h60
  text "Current Sensor V2 / 6-2018 / KD" at 7510,480 h60
Mechanical 1:
  lines w10: 5,5 5,2995 8995,2995 8995,5 5,5